# EAGLE board Franzininho (EAGLE 7.5.0)
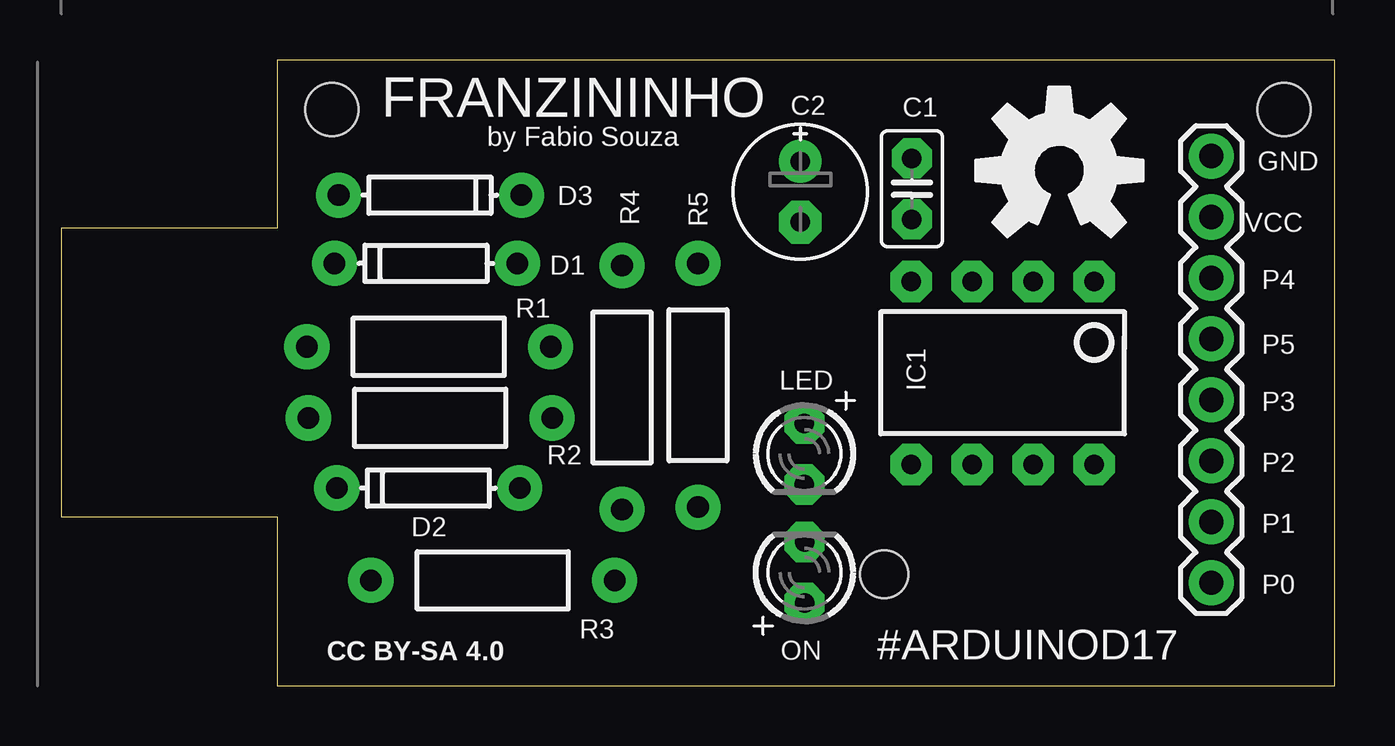
[diagram p0: board, top side]
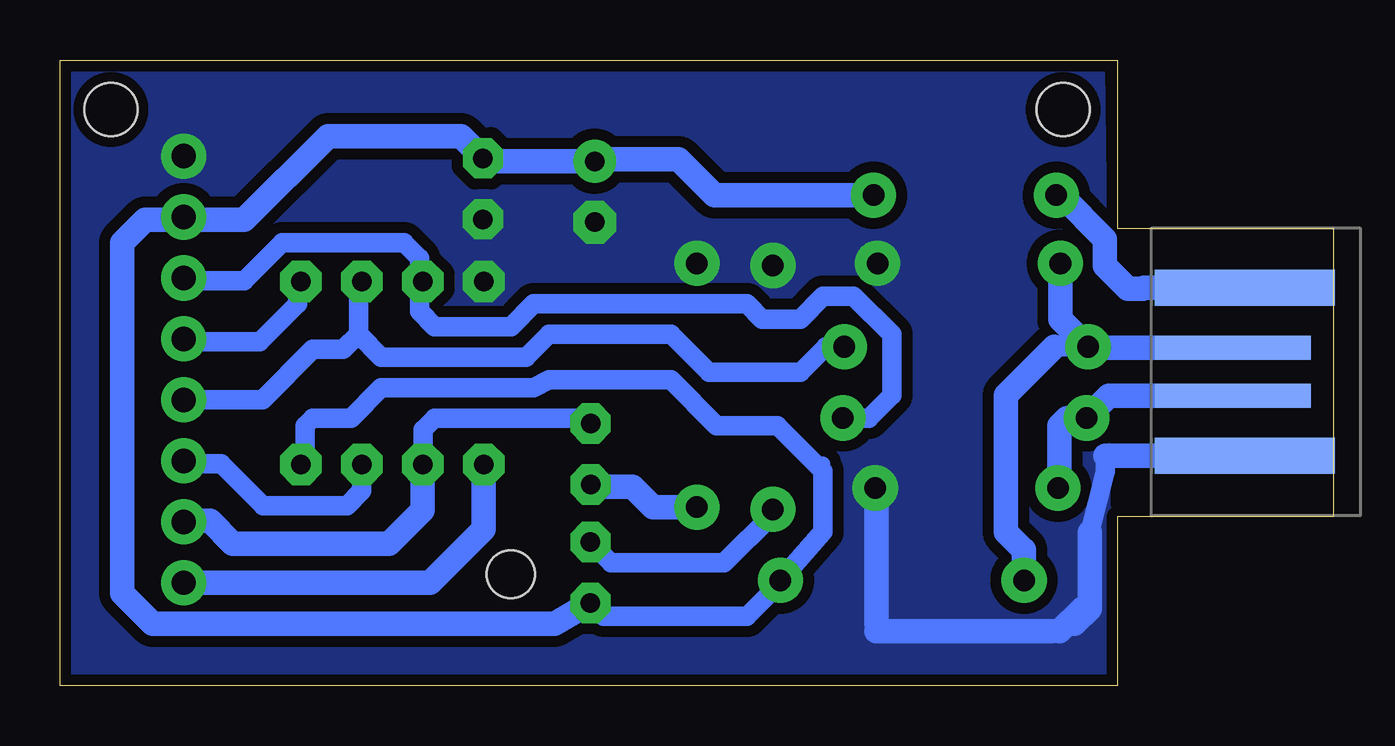
[diagram p1: board, bottom side, seen from below]

Size 53.08 x 26.08 mm. Coordinates in mm from the lower left corner, seen from the top.
Outline: 0,7.04 9,7.04 9,0 53.08,0 53.08,26.08 9,26.08 9,19.07 0,19.07 0,7.04
Copper layers (1*16): Top 0.0356mm / dielectric 1.5011mm / Bottom 0.0356mm
Design rules "default *": minimum track width 8mil, minimum drill 13mil, track to track 12mil, track to pad 12mil, pad to pad 12mil, via to via 12mil, smd to smd 8mil, copper to edge 15mil, drill to drill 15mil, minimum pad ring 7mil, minimum via ring 7mil, stop-mask expansion 4mil, vias tented up to drill 25mil, thermal gap 10mil
Holes 2.2 mm at 11.27,24.02 50.96,24.02
Holes 2 mm at 34.29,4.65

## Footprints (pad centres in the part's own frame; a part is rotated, then mirrored left to right if it is on the bottom)
C025-025X050 = drill 0.813 pad 1.676 octagon: 1 -1.27,0; 2 1.27,0
E2,5-6E = drill 0.813 pad 1.778: + -1.27,0 | drill 0.813 pad 1.778 octagon: - 1.27,0
DIODE-BZT52 = drill 0.9 pad 1.88: A -3.81,0; C 3.81,0
DIODE-1N4148 = drill 0.9 pad 1.88: A -3.81,0; C 3.81,0
DIP08 = drill 0.813 pad 1.727 octagon: 1 -3.81,-3.81; 2 -1.27,-3.81; 3 1.27,-3.81; 4 3.81,-3.81; 5 3.81,3.81; 6 1.27,3.81; 7 -1.27,3.81; 8 -3.81,3.81
1X08_ROUND = drill 1.016 pad 1.88: 1 0,0; 2 2.54,0; 3 5.08,0; 4 7.62,0; 5 10.16,0; 6 12.7,0; 7 15.24,0; 8 17.78,0
LED3MM = drill 0.813 pad 1.676 octagon: A -1.27,0; K 1.27,0
AXIAL-0.4 = drill 0.9 pad 1.88: P$1 -5.08,0; P$2 5.08,0
USB-A-PCB = smd 7.5 x 1.5: 5V -0.2,-3.5; GND -0.2,3.5 | smd 6.5 x 1: USB_M 0.3,-1; USB_P 0.3,1

## Placement (x,y rotation side)
C1  0.1uf  [C025-025X050]  35.45,20.71 270 top
C2  10uF  [E2,5-6E]  30.8,20.59 270 top
D1  BZT52  [DIODE-BZT52]  15.19,17.61 180 top
D2  BZT52  [DIODE-BZT52]  15.29,8.24 180 top
D3  1N4148  [DIODE-1N4148]  15.36,20.45 0 top
IC1  ATTINY85 - 20PU  [DIP08]  39.23,13.04 180 top
JP3  [1X08_ROUND]  47.93,4.3 90 top
LED  [LED3MM]  30.97,9.67 270 top
LOGO1  OSHW-LOGOL  [OSHW-LOGO-L]  41.59,21.48 0 top
ON  [LED3MM]  30.97,4.73 90 top
R1  68R  [AXIAL-0.4]  15.31,14.13 0 top
R2  68R  [AXIAL-0.4]  15.37,11.17 0 top
R3  1K5  [AXIAL-0.4]  17.98,4.39 180 top
R4  1K  [AXIAL-0.4]  23.37,12.44 270 top
R5  1K  [AXIAL-0.4]  26.53,12.53 270 top
X1  USBPCB  [USB-A-PCB]  3.89,13.09 180 bottom

## Library data of the parts
C1 C2 LED ON = adafruit
D1 D2 = SparkFun-DiscreteSemi; PROD-ID: DIO-08199
D3 = SparkFun-DiscreteSemi; PROD_ID: DIO-08378
IC1 = SparkFun-DigitalIC; PROD_ID: IC-09439
JP3 = SparkFun-Connectors; PROD_ID: CONN-08437
LOGO1 = SparkFun-Aesthetics
R1-R5 = SparkFun-Passives
X1 = SparkFun

## Nets
5V: C1.1 C2.+ D3.C IC1.8 JP3.7 ON.A R3.P$1
GND: C1.2 C2.- D1.A D2.A IC1.4 JP3.8 R4.P$1 R5.P$1 X1.GND
N$1: IC1.2 JP3.4 R1.P$2
N$2: IC1.6 JP3.2 LED.A
N$3: IC1.5 JP3.1
N$4: D3.A X1.5V
N$5: IC1.7 JP3.3
N$6: IC1.3 JP3.6 R2.P$2
N$8: IC1.1 JP3.5
N$10: D1.C R1.P$1 R3.P$2 X1.USB_M
N$11: D2.C R2.P$1 X1.USB_P
N$12: LED.K R5.P$2
N$17: ON.K R4.P$2

## Tracks (layer width: path | path; a pad name or v marks a point on that pad's centre or on a via)
5V
  Bottom 0.406: D3.C 19.13,20.45 19.05,20.37 | 48.28,19.41 JP3.7
  Bottom 0.61: 21.27,9.26 21.27,8.94
  Bottom 0.813: 30.7,21.95 C2.+ | 35.33,21.86 C1.1 | IC1.8 42.86,9.41 42.86,10.84 42.55,11.16 40.96,11.16 39.69,12.43 33.34,12.43 32.7,12.75 27.62,12.75 25.72,10.84 23.18,10.84 21.27,8.94 21.27,6.42 R3.P$1 23.06,4.3 24.45,2.91 30.42,2.91 ON.A
  Bottom 1.016: 48.28,19.41 45.4,19.41 41.91,22.91 36.37,22.91 C1.1 | ON.A 32.48,2.59 49.21,2.59 50.48,3.86 50.48,18.46 49.53,19.41 48.05,19.41 JP3.7 | D3.C 25.8,20.45 27.3,21.95 30.7,21.95 | C2.+ 35.33,21.86
GND
  Bottom 0.406: 19.05,2.27 19.05,2.59 | 19.05,8.19 D2.A
  Bottom 0.813: 9.51,9.59 9.51,8.96 10.16,6.4
  Bottom 1.016: X1.GND 9.51,9.59 | 11.75,2.27 19.05,2.27 | 19.05,2.59 19.05,8.19 | 10.16,6.4 10.16,3.22 | 10.79,2.59 10.16,3.22 | 10.16,3.22 10.48,3.22 11.43,2.27
  pour Bottom (isolate 0.457, no thermals): 9.53,25.77 52.86,25.77 52.86,0.21 9.21,0.36
N$1
  Bottom 0.813: 40.64,14.65 39.69,13.7 33.66,13.7 32.7,14.65 27.62,14.65 26.04,13.06 22.23,13.06 21.16,14.13 R1.P$2 | 40.64,14.65 40.64,16.71 IC1.2 | JP3.4 44.65,11.92 42.55,14.02 41.27,14.02 40.64,14.65
N$2
  Bottom 0.406: 37.94,9.25 IC1.6
  Bottom 0.813: 37.94,9.25 37.94,10.68 37.47,11.16 31.19,11.16
  Bottom 1.016: IC1.6 37.96,7.33 39.37,5.92 45.88,5.92 46.83,6.87 47.89,6.87 JP3.2 | 31.19,11.16 LED.A
N$3
  Bottom 1.016: IC1.5 35.42,6.54 37.66,4.3 JP3.1
N$4
  Bottom 0.813: D3.A 11.35,20.45 | 5.87,16.4 6.03,16.56 7.94,16.56 7.91,16.59
  Bottom 1.016: 11.35,20.45 9.53,18.62 9.53,17.51 8.57,16.56 7.94,16.56 | X1.5V 7.91,16.59
N$5
  Bottom 0.813: IC1.7 40.5,8.12 41.12,7.51 44.61,7.51 46.35,9.26 47.8,9.26 JP3.3
N$6
  Bottom 0.406: 38.1,16.71 IC1.3 | 47.8,16.88 JP3.6
  Bottom 0.61: R2.P$2
  Bottom 0.813: 47.8,16.88 45.4,16.88 43.81,18.46 38.73,18.46 38.1,17.83 38.1,16.71 38.1,15.61 37.47,14.97 34.29,14.97 33.34,15.92 24.45,15.92 23.81,15.29 22.23,15.29 21.27,16.24 20,16.24 18.41,14.65 18.41,12.11 19.37,11.16 R2.P$2
N$8
  Bottom 0.61: 47.8,14.34 JP3.5 | IC1.1 43.18,16.71
  Bottom 0.813: 43.18,16.71 43.18,15.92 44.77,14.34 47.8,14.34
N$10
  Bottom 0.406: 10.19,14.09 R1.P$1 | 13.02,5.76 12.99,5.76 12.9,5.67
  Bottom 0.813: R1.P$1 11.63,14.13
  Bottom 1.016: X1.USB_M 10.19,14.09 | D1.C 11.38,15.29 R1.P$1 | 11.63,14.13 13.65,12.11 13.65,6.4 13.02,5.76 | R3.P$2 12.9,5.67
N$11
  Bottom 0.61: R2.P$1 10.29,11.03 | 11.43,8.3 D2.C
  Bottom 1.016: X1.USB_P 9.37,12.09 R2.P$1 11.11,11.16 11.43,10.84 11.43,8.3
N$12
  Bottom 0.813: 30.87,8.3 LED.K
  Bottom 1.016: R5.P$2 28.36,7.45 29.21,8.3 30.87,8.3
N$17
  Bottom 0.406: R4.P$2 23.37,7.16
  Bottom 0.813: 23.37,7.16 25.4,5.13 30.1,5.13 ON.K

## Text on the board
tNames: FRANZININHO | by Fabio Souza | GND | VCC | P4 | P5 | P3 | P2 | P1 | P0 | #ARDUINOD17 | CC BY-SA 4.0